# EAGLE board semi-controlled-rectifier-breakout-board (EAGLE 9.6.2)
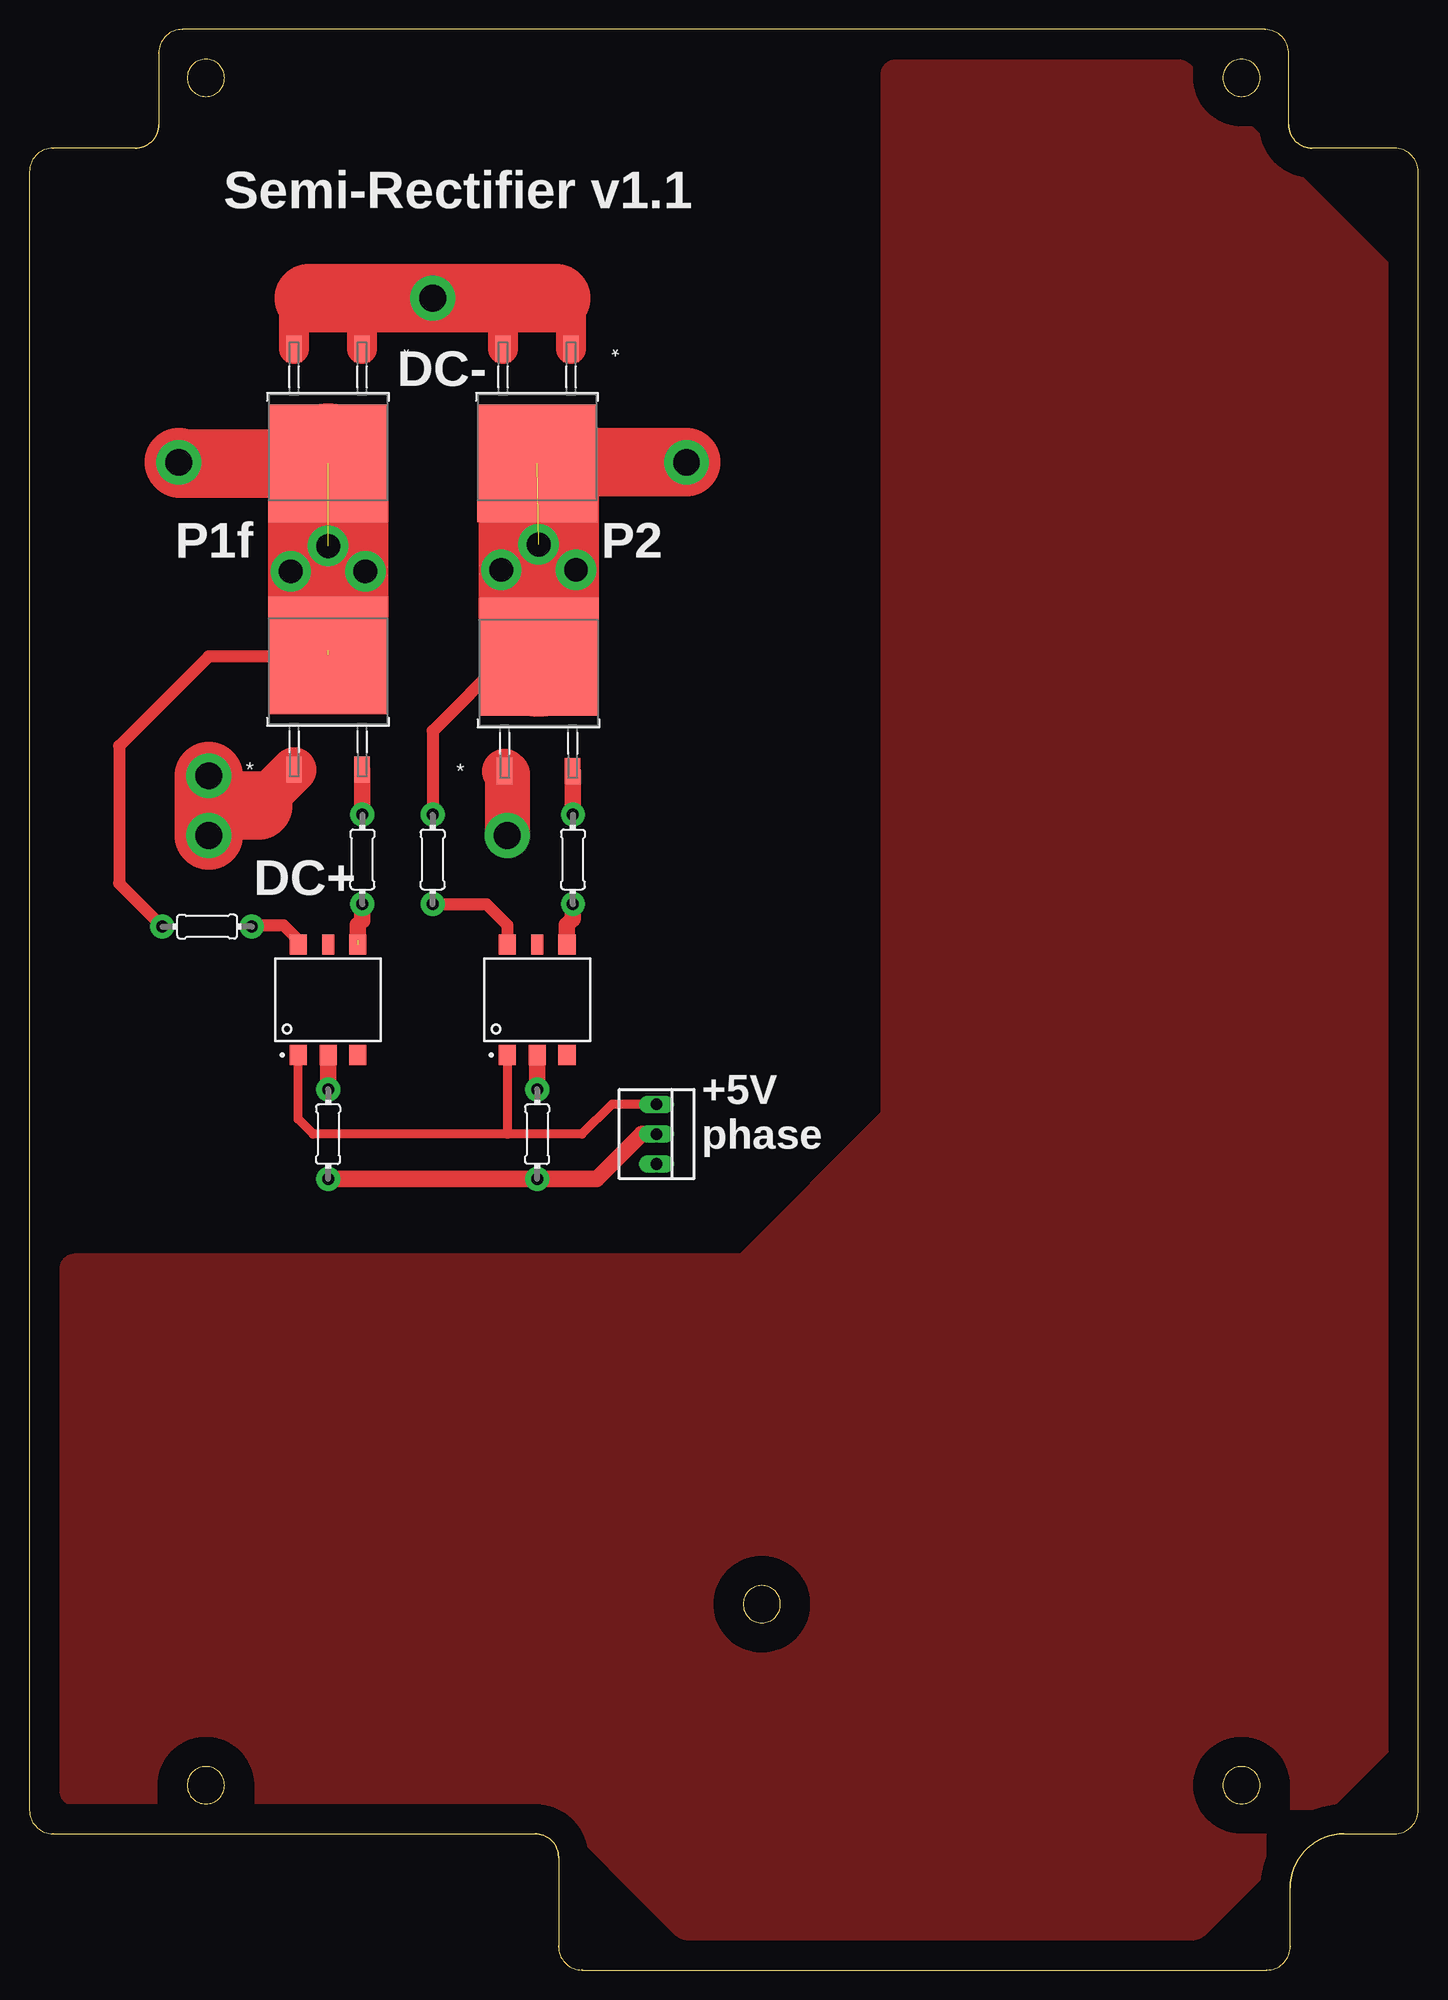
[diagram p0: board, top side]
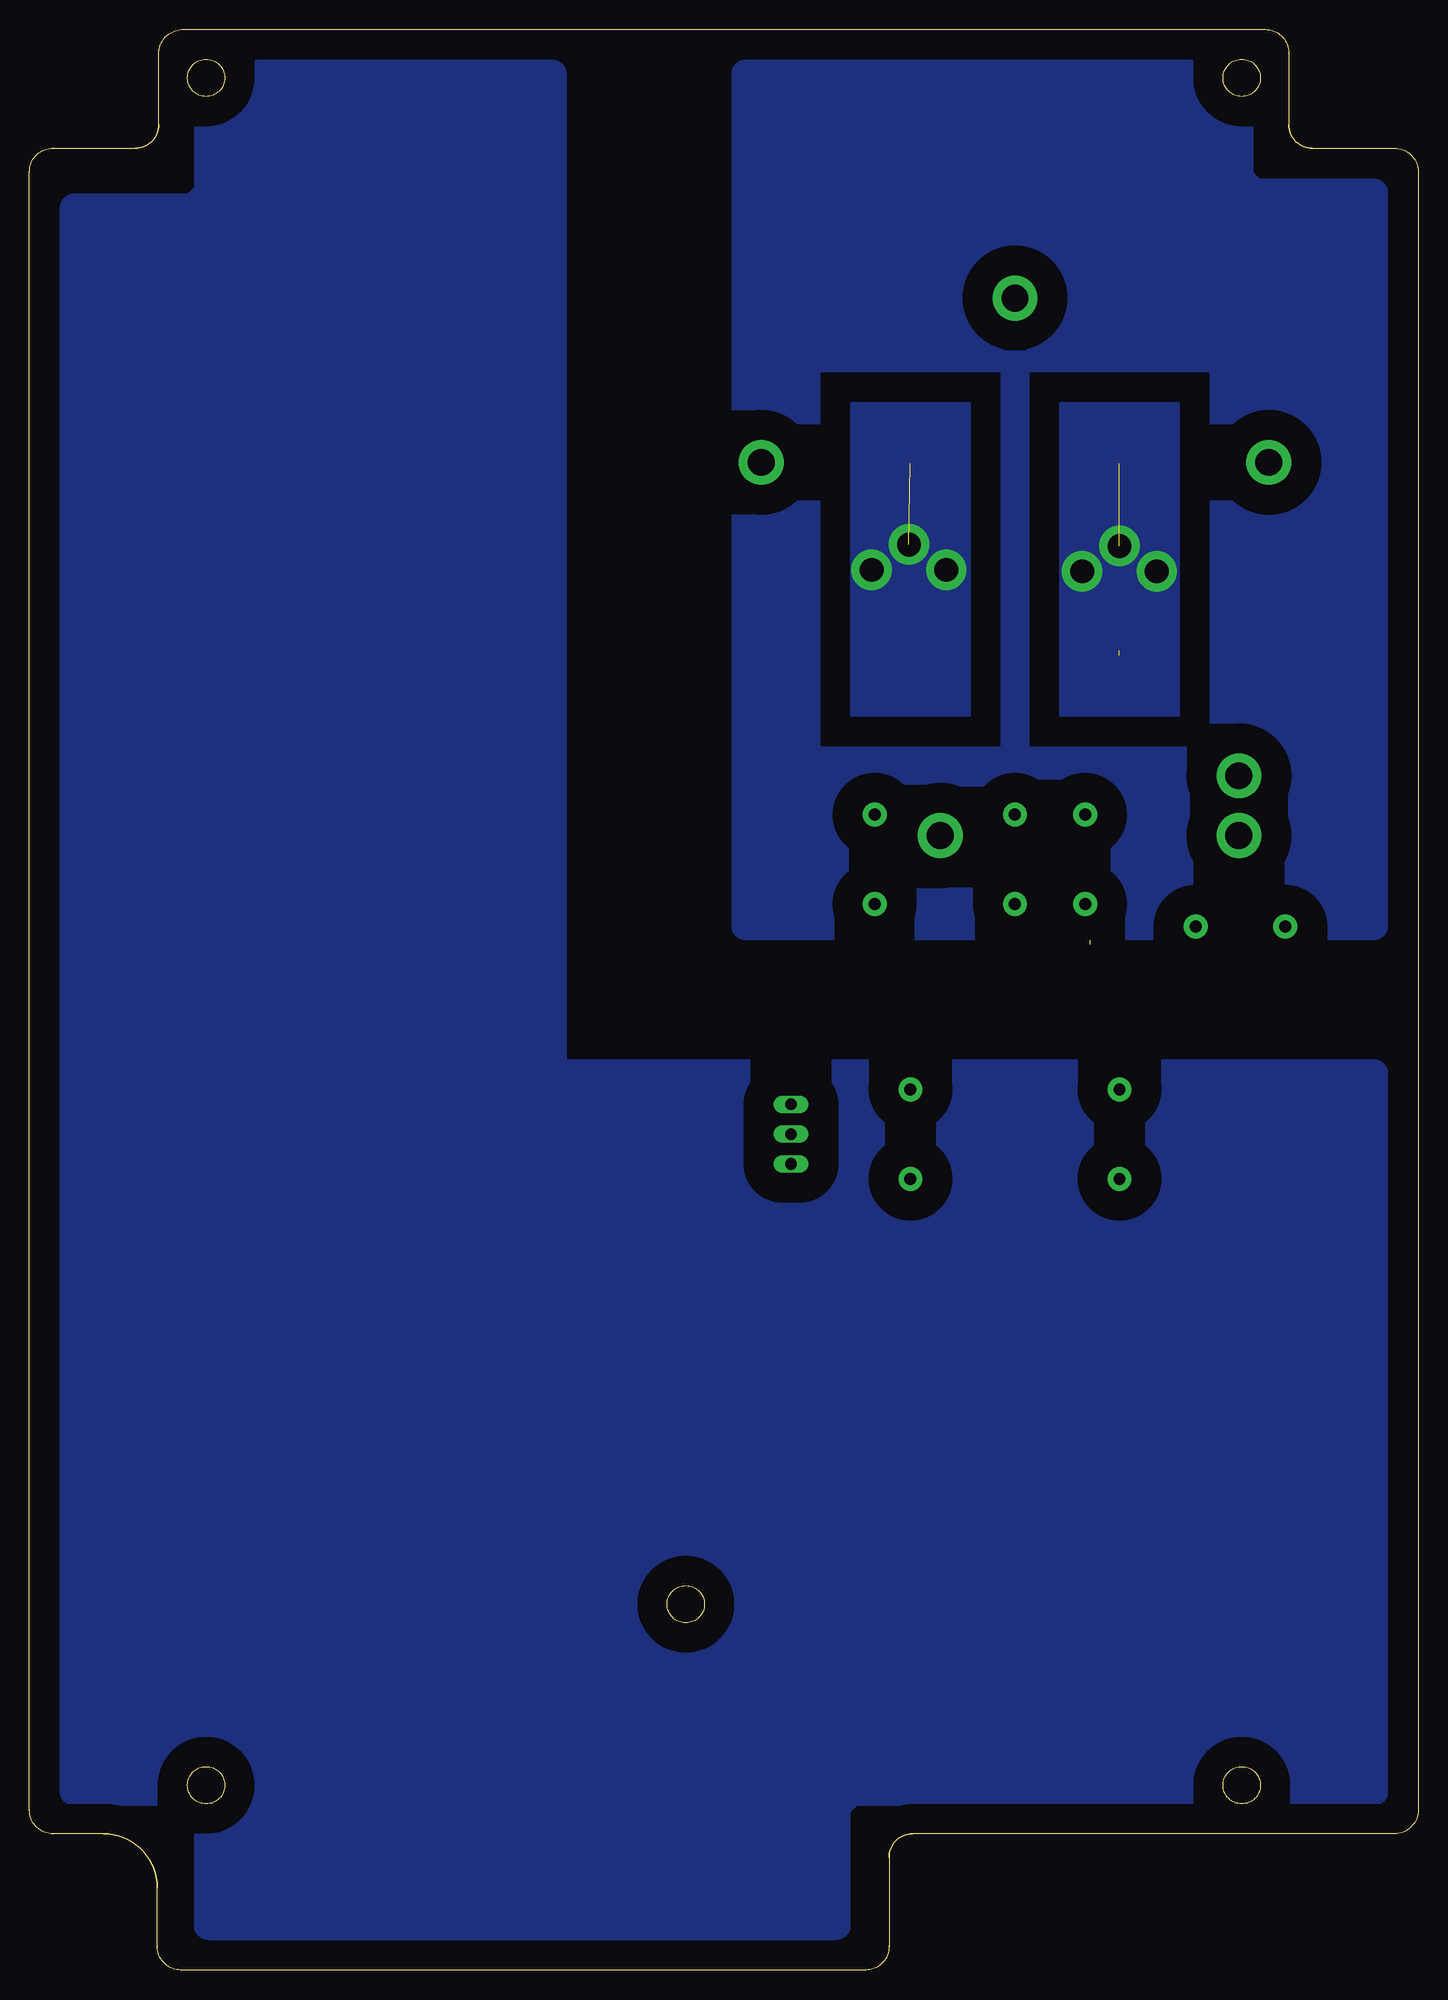
[diagram p1: board, bottom side, seen from below]

Size 118.13 x 165.11 mm. Coordinates in mm from the lower left corner, seen from the top.
Outline: 107.11,163.01 arc-179 107.13,163.01 arc-180 107.11,163.01
Outline: 107.11,163.01 arc1 107.11,163.01
Outline: 111.84,11.6 116.12,11.6 arc90 118.12,13.6 118.12,153.01 arc90 116.12,155.01 109.12,155.01 arc-90 107.12,157.01 107.12,163.01 arc90 105.12,165.11 13.01,165.11 arc90 11.01,163.11 11.01,157.01 arc-90 9.01,155.01 2.01,155.01 arc90 0.01,153.01 0.01,13.61 arc90 2.01,11.61 43.01,11.61 arc-90 45.01,9.61 45.01,2.01 arc90 47.01,0.01 105.24,0.01 arc90 107.24,2.01 107.24,7.01 arc-90 111.84,11.6
Outline: 116.12,11.6 arc180 116.12,11.61 arc180 116.12,11.6
Outline: 111.84,11.61 arc180 111.84,11.6 arc180 111.84,11.61
Outline: 118.13,13.6 arc180 118.11,13.6 arc180 118.13,13.6
Outline: 118.13,153.01 arc180 118.11,153.01 arc180 118.13,153.01
Outline: 116.12,155.01 arc180 116.12,155 arc180 116.12,155.01
Outline: 109.12,155.01 arc180 109.12,155 arc180 109.12,155.01
Outline: 107.13,157.01 arc180 107.11,157.01 arc180 107.13,157.01
Outline: 105.12,165.11 arc180 105.12,165.1 arc180 105.12,165.11
Outline: 13.01,165.11 arc180 13.01,165.1 arc180 13.01,165.11
Outline: 11,163.11 arc180 11.01,163.11 arc180 11,163.11
Outline: 11,157.01 arc180 11.01,157.01 arc180 11,157.01
Outline: 9.01,155.01 arc180 9.01,155 arc180 9.01,155.01
Outline: 2.01,155.01 arc180 2.01,155 arc180 2.01,155.01
Outline: 0,153.01 arc180 0.01,153.01 arc180 0,153.01
Outline: 0,13.61 arc180 0.01,13.61 arc180 0,13.61
Outline: 2.01,11.6 arc180 2.01,11.61 arc180 2.01,11.6
Outline: 43.01,11.6 arc180 43.01,11.61 arc180 43.01,11.6
Outline: 45,9.61 arc180 45.01,9.61 arc180 45,9.61
Outline: 45,2.01 arc180 45.01,2.01 arc180 45,2.01
Outline: 47.01,0 arc180 47.01,0.01 arc180 47.01,0
Outline: 105.24,0 arc180 105.24,0.01 arc180 105.24,0
Outline: 107.25,2.01 arc180 107.23,2.01 arc180 107.25,2.01
Outline: 107.25,7.01 arc180 107.23,7.01 arc180 107.25,7.01
Outline: 15.01,14.14 arc180 15.01,17.32 arc180 15.01,14.14
Outline: 103.1,14.14 arc180 103.1,17.32 arc180 103.1,14.14
Outline: 15.01,159.4 arc180 15.01,162.57 arc180 15.01,159.4
Outline: 103.1,159.4 arc180 103.1,162.57 arc180 103.1,159.4
Outline: 62.3,29.54 arc180 62.3,32.72 arc180 62.3,29.54
Copper layers (1*16): Top 0.035mm / dielectric 1.5mm / Bottom 0.035mm
Design rules "default": minimum track width 6mil, minimum drill 0.35mm, track to track 6mil, track to pad 6mil, pad to pad 6mil, via to via 6mil, smd to smd 6mil, copper to edge 40mil, drill to drill 6mil, minimum pad ring 10mil, minimum via ring 8mil, stop-mask expansion 4mil, vias tented up to drill 0mil, thermal gap 10mil
Milling: area 0,0 to 118.1,165.1

## Footprints (pad centres in the part's own frame; a part is rotated, then mirrored left to right if it is on the bottom)
0204/7_TH = drill 1.016 pad 2.032: P$1 -3.81,0; P$2 3.81,0
DIO_RFN10N_ROM-M = smd 1.321 x 2.21: 1 -2.896,-8.369; 2 2.896,-8.369 | smd 10.211 x 10.008: 3 0,1.372
SOIC254P1030X460-6N = smd 1.7 x 1.45: 1 -4.7,2.54; 2 -4.7,0; 3 -4.7,-2.54; 4 4.7,-2.54; 6 4.7,2.54 | smd 1.7 x 1.018: 5 4.7,0
90MIL_TERMINAL = drill 2.286 pad 3.81: 1 0,0
1000MIL_JUMPER = drill 2.286 pad 3.81: 1 -12.7,0; 2 12.7,0
22-23-2031 = drill 1 long: 1 -2.54,0; 2 0,0; 3 2.54,0

## Placement (x,y rotation side)
D1  DIODE  [0204/7_TH]  34.3,94.49 270 top
D2  DIODE  [0204/7_TH]  15.12,88.78 0 top
D8  RFN20NS6SFHTL  [DIO_RFN10N_ROM-M]  25.41,129.55 180 top
D9  RFN20NS6SFHTL  [DIO_RFN10N_ROM-M]  43.19,129.55 180 top
R6A  180  [0204/7_TH]  28.33,94.49 270 top
R6B  180  [0204/7_TH]  46.23,94.49 270 top
R20A  200  [0204/7_TH]  43.19,71.13 90 top
R20B  200  [0204/7_TH]  25.41,71.13 90 top
U8  TN4015H-6G  [DIO_RFN10N_ROM-M]  25.41,110.5 0 top
U9  TN4015H-6G  [DIO_RFN10N_ROM-M]  43.31,110.37 0 top
U10  VO3053-X007T  [SOIC254P1030X460-6N]  25.41,82.56 90 top
U11  VO3053-X007T  [SOIC254P1030X460-6N]  43.19,82.56 90 top
U$1  90MIL_TERMINAL  [90MIL_TERMINAL]  12.71,128.28 270 top
U$2  90MIL_TERMINAL  [90MIL_TERMINAL]  55.89,128.28 270 top
U$3  90MIL_TERMINAL  [90MIL_TERMINAL]  15.25,101.61 270 top
U$4  90MIL_TERMINAL  [90MIL_TERMINAL]  34.3,142.25 270 top
U$5  1000MIL_JUMPER  [1000MIL_JUMPER]  27.95,96.53 180 top
X1  22-23-2031  [22-23-2031]  53.35,71.13 270 top

## Library data of the parts
D1 D2 R6A R6B R20A R20B U8-U11 U$1-U$5 = RectifierParts
D8 D9 = RectifierParts; COPYRIGHT: Copyright (C) 2022 Ultra Librarian. All rights reserved.; DIGI-KEY_PART_NUMBER_1: RFN20NS6SFHTLCT-ND; DIGI-KEY_PART_NUMBER_2: RFN20NS6SFHTLDKR-ND; DIGI-KEY_PART_NUMBER_3: RFN20NS6SFHTLTR-ND; MANUFACTURER_PART_NUMBER: RFN20NS6SFHTL; MFR_NAME: ROHM Semiconductor
X1 = con-molex; MF: MOLEX; MPN: 22-23-2031; OC_FARNELL: 1462950; OC_NEWARK: 30C0862

## Nets
+5VDC: U10.1 U11.1 X1.1
DC+: U8.1 U$3.1 U$5.2
DC-: D8.1 D8.2 D9.1 D9.2 U$4.1
N$1: U9.1 U$5.1
N$2: R6A.P$2 U10.4
N$3: D1.P$2 U11.6
N$4: R6B.P$2 U11.4
N$5: R6A.P$1 U8.2
N$6: R6B.P$1 U9.2
N$7: R20A.P$2 U11.2
N$8: R20B.P$2 U10.2
N$9: D2.P$2 U10.6
P1_FUSED: D2.P$1 D8.3 U8.3 U$1.1
P2_IN: D1.P$1 D9.3 U9.3 U$2.1
PHASE_CONTROL_SIGNAL: R20A.P$1 R20B.P$1 X1.2

## Tracks (layer width: path | path; a pad name or v marks a point on that pad's centre or on a via)
+5VDC
  Top 0.762: U10.1 22.87,72.4 24.14,71.13 40.65,71.13 | X1.1 49.54,73.67 47,71.13 40.65,71.13 | U11.1 40.65,71.13
AC_BACK
  pour Bottom (isolate 2.54, rank 2, no thermals): 3.82,151.14 13.98,151.14 15.25,152.41 15.25,161.3 57.16,161.3 57.16,88.91 3.82,88.91
DC+
  Top 3.81: U8.1 19.45,99.07 19.06,99.07
  Top 5.842: 15.25,99.07 19.45,99.07 | U$5.2 15.25,99.07 | 15.25,99.07 U$3.1
DC-
  Top 2.54: 23.78,142.25 22.51,140.98 D8.2 | D9.1 46.08,140.98 44.81,142.25 | D9.2 40.29,141.33 39.38,142.25 | D8.1 28.3,141.33 29.22,142.25
  Top 5.842: 23.78,142.25 29.22,142.25 U$4.1 39.38,142.25 44.81,142.25
DC_BACK
  pour Bottom (isolate 2.54): 3.82,76.21 57.16,76.21 73.67,76.21 73.67,161.3 102.88,161.3 102.88,151.14 104.15,149.87 114.31,149.87 114.31,15.25 104.15,15.25 102.88,13.98 102.88,3.82 49.54,3.82 49.54,13.98 48.27,15.25 3.82,15.25
HEAT_PLANE
  pour Top (isolate 2.54): 73.67,161.3 73.67,72.4 60.97,59.7 3.82,59.7 3.82,15.25 44.46,15.25 55.89,3.82 99.07,3.82 115.58,20.33 115.58,143.52 97.8,161.3
N$1
  Top 3.81: U9.1 40.65,101.77 U$5.1
N$2  (1 unrouted)
  Top 1.397: R6A.P$2 28.33,89.29 27.95,88.91 27.95,87.64
N$3
  Top 1.016: U11.6 40.65,88.91 38.87,90.68 D1.P$2
N$4
  Top 1.397: R6B.P$2 46.23,89.41 45.73,88.91 U11.4
N$5
  Top 1.397: R6A.P$1 28.3,98.33 U8.2
N$6
  Top 1.397: U9.2 46.21,98.33 R6B.P$1
N$7
  Top 1.397: U11.2 R20A.P$2
N$8
  Top 1.397: U10.2 R20B.P$2
N$9
  Top 1.016: D2.P$2 19.06,88.91 21.6,88.91 22.87,87.64 U10.6
P1_FUSED  (via drill 2.03 pad 3.43)  (2 unrouted)
  Top 1.016: 29.11,111.87 U8.3 25.3,111.77 15.25,111.77 7.63,104.15 7.63,92.46 D2.P$1
  Top 10.262: D8.3 25.41,112.27
  Top 5.842: D8.3 12.81,128.17 U$1.1
  other vias: 28.58,119.01 22.23,119.01 25.41,121.16
  pour Bottom (isolate 1.27): 20.33,133.36 30.49,133.36 30.49,106.69 20.33,106.69
P2_IN  (via drill 2.03 pad 3.43)  (1 unrouted)
  Top 1.016: U9.3 40.62,111.74 34.3,105.42 D1.P$1
  Top 10.262: 43.31,128.05 U9.3
  Top 5.842: 43.31,128.05 D9.3 43.29,128.28 U$2.1
  other vias: 46.49,119.13 40.14,119.13 43.31,121.29
  pour Bottom: 38.11,133.36 48.27,133.36 48.27,106.69 38.11,106.69
PHASE_CONTROL_SIGNAL
  Top 1.397: R20B.P$1 R20A.P$1 48.27,67.32 52.08,71.13 X1.2

## Text on the board
tNames: Semi-Rectifier v1.1 | DC- | P1f | P2 | DC+ | +5V | phase